# Altium PCB PCB1.PcbDoc (part 3 of 9)
Units mm, origin at the board's own origin, x right, y up, seen from the top; angles counter-clockwise.
Board outline 227 x 102 mm, 4 copper layers (Top Layer, MidLayer1, MidLayer2, Bottom Layer); 425 components, 426 nets, 1455 pads, 440 vias.
Unrouted connection lines stored in the file: 2.
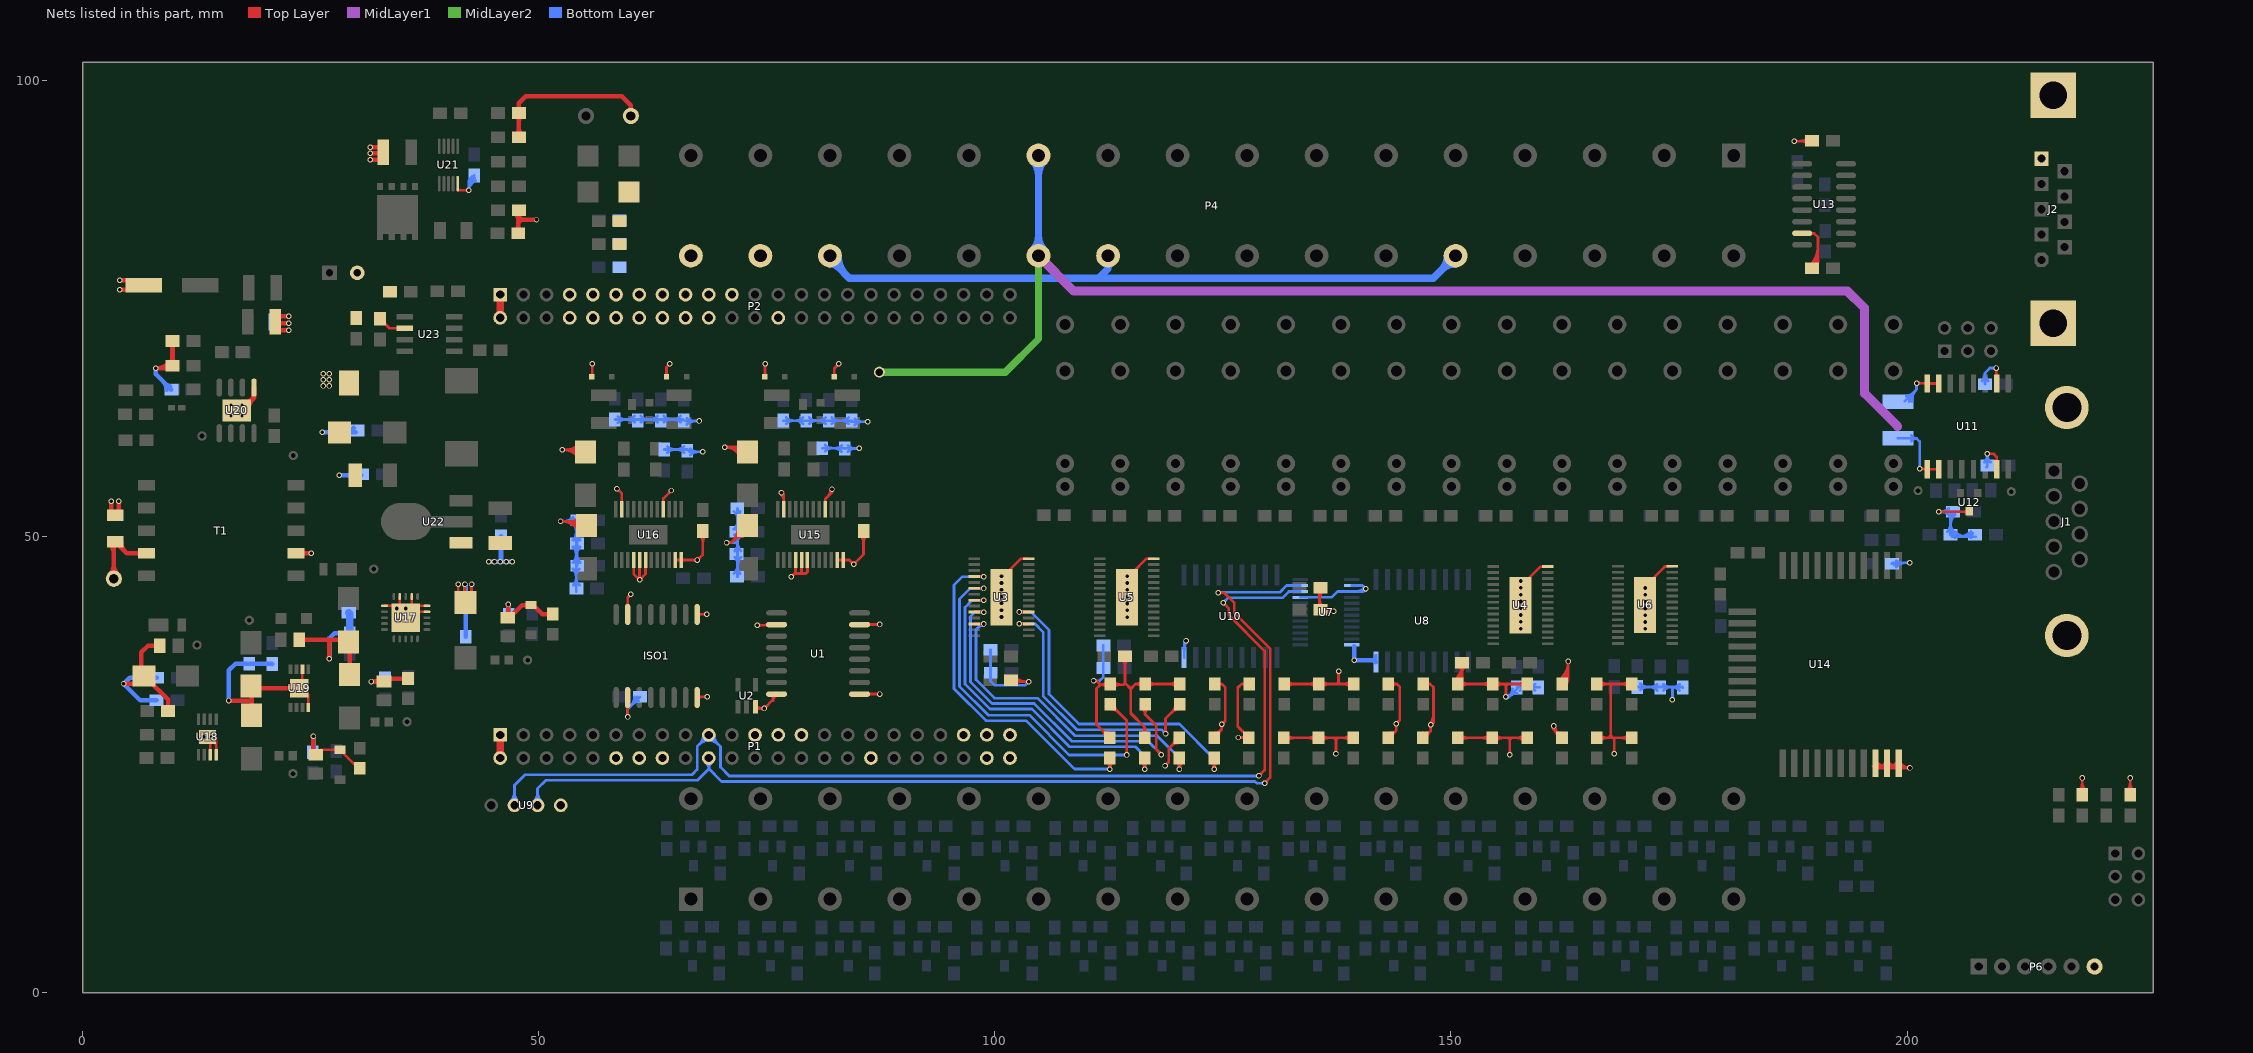
[diagram p5: the nets of this part, all layers, seen from the top]

## Via types
v1: diameter 0.6, hole 0.4, Top Layer to Bottom Layer, 427 vias
v2: diameter 0.5, hole 0.2, Top Layer to Bottom Layer, 9 vias
v3: diameter 0.66, hole 0.33, Top Layer to Bottom Layer, 4 vias

## Nets (pads, with @x,y where several pads share a name; then routed paths per layer and width w, separated by ;. In a path a pad name is that pad's centre, name@x,y a point inside that pad or via, vN(x,y) a via of type N, cw(c..) or ccw(c..) an arc to the next point about the centre after c; other vN are vias at no path point) (continued)
DGND: C1.1 C2.1 C3.1 C4.1 C5.1 C6.1 C7.1 C8.1 C9.1 C10.1 C11.1 C12.1 C13.1 C14.1 C15.1 C16.2 C21.2 C24.1 C25.2 C26.1 C27.1 C28.1 C48.2 C80.2 C81.2 C82.2 C83.2 C85.1 C86.2 C87.2 C88.2 C89.1 C90.1 C92.2 C93.2 C94.1 C95.2 C96.2 CA1.2 CA2.2 D2.1 D3.2 D4.2 D5.2 D6.2 D7.2 D8.2 D9.2 D10.2 D11.2 D12.2 D13.2 D14.2 D15.2 D16.2 D17.2 D18.2 D19.2 D20.2 D21.2 D22.2 D23.2 D24.2 D25.2 D26.2 D27.2 D28.2 D29.2 D30.2 D31.2 D32.2 D33.2 D34.2 D67.2 ISO1.2 ISO1.8 J2.5 J2.10 J2.11 P1.1 P1.2 P1.43 P1.44 P1.45 P1.46 P2.1 P2.2 P4.10 P4.20 P4.28 P4.30 P4.32 P6.6 R3.1 R4.1 R7.1 R8.1 R147.1 R148.1 R153.1 R154.1 R155.1 R157.2 TP12.1 U1.2 U1.8 U1.9 U1.15 U2.3 U3.28 U3.29 U4.28 U4.29 U5.28 U5.29 U6.28 U6.29 U7.2 U7.3 U7.12 U7.21 U8.9 U9.4 U10.9 U11.2 U11.7 U11.8 U13.15 U14.30 U14.31 U14.32 U20.1 U20.9 U21.5 U22.1 U23.6 | length 575.5
  Top Layer w0.3: C90.1@32.61,73.906 33.652,72.864 U23.6@35.33,72.864 ; C90.1@33.095,73.779 ccw(c33.959,73.779) 33.348,73.168 ; U21.5@41.13,88.13 41.27,87.99 v1(42.33,87.99) ; v1@42.224,87.884 ccw(c41.968,87.628) 41.968,87.99 ccw(c41.968,88.352) v1@42.224,88.096 ; ISO1.2@59.649,31.434 cw(c59.357,31.142) 59.77,31.142 ; v1@59.664,30.366 ccw(c59.408,30.622) 59.77,30.622 ccw(c60.132,30.622) v1@59.876,30.366 ; ISO1.2@59.755,32.39 59.77,32.375 v1(59.77,30.26) ; 59.77,31.214 cw(c60.081,31.214) ISO1.2@59.861,31.434 ; ISO1.8@67.375,32.39 67.445,32.46 v1(68.48,32.46) ; ISO1.8@67.481,32.284 cw(c67.906,31.859) 67.906,32.46 ; v1@68.374,32.354 ccw(c68.118,32.098) 68.118,32.46 ccw(c68.118,32.822) v1@68.374,32.566 ; U2.3@73.75,31.376 73.936,31.19 v1(74.73,31.19) 75.69,32.15 75.69,32.69 U1.8@75.81,32.81 ; U2.3@73.841,31.468 ccw(c74.512,32.138) v1@74.512,31.19 ; v1(73.97,40.31) 75.995,40.31 U1.2@76.07,40.385 ; v1@74.076,40.204 cw(c74.332,39.948) 74.332,40.31 cw(c74.332,40.672) v1@74.076,40.416 ; v1@74.624,31.084 ccw(c74.368,30.828) 74.368,31.19 ccw(c74.368,31.552) v1@74.624,31.296 ; 74.677,40.31 ccw(c74.677,40.928) U1.2@75.114,40.491 ; v1@74.73,31.34 ccw(c74.73,31.702) 74.986,31.446 ccw(c75.242,31.19) v1@74.88,31.19 ; 75.69,32.042 cw(c76.298,32.042) U1.8@76.115,32.622 ; 75.69,32.451 cw(c76.169,32.451) U1.8@76.025,32.908 ; U1.9@84.93,32.71 84.99,32.77 v1(87.37,32.77) ; U1.15@85.17,40.385 85.185,40.4 v1(87.37,40.4) ; U1.9@86.126,32.659 cw(c86.394,32.391) 86.394,32.77 ; U1.9@86.126,32.871 ccw(c86.37,33.115) 86.37,32.77 ; U1.15@86.126,40.279 cw(c86.418,39.987) 86.418,40.4 ; U1.15@86.126,40.491 ccw(c86.346,40.711) 86.346,40.4 ; v1@87.264,32.664 ccw(c87.008,32.408) 87.008,32.77 ccw(c87.008,33.132) v1@87.264,32.876 ; v1@87.264,40.294 ccw(c87.008,40.038) 87.008,40.4 ccw(c87.008,40.762) v1@87.264,40.506 ; U3.29@101.238,45.997 102.846,47.605 U3.28@103.702,47.605 ; R3.1@101.78,34.28 101.94,34.12 v1(103.71,34.12) ; R3.1@102.038,34.411 ccw(c102.74,35.113) 102.74,34.12 ; R3.1@102.25,33.937 cw(c102.692,33.495) 102.692,34.12 ; R3.1@102.25,34.623 ccw(c103.464,35.837) v1@103.464,34.12 ; v1@103.604,34.014 ccw(c103.348,33.758) 103.348,34.12 ccw(c103.348,34.482) v1@103.604,34.226 ; v1(110.82,34.225) 111.145,34.225 111.58,33.79 ; 111.662,28.909 ccw(c112.601,29.848) D3.2@112.601,28.52 ; 111.819,28.752 cw(c111.102,28.035) D3.2@112.116,28.035 ; D4.2@112.29,34.119 cw(c111.58,34.721) 111.58,33.79 ; D4.2@112.305,33.474 ccw(c111.58,32.799) 111.58,33.79 ; D4.2@112.58,33.79 D4.2@112.66,33.87 ; D3.2@112.601,27.97 111.15,29.421 111.15,33.36 111.58,33.79 ; D4.2@113.003,33.462 cw(c113.795,32.67) 113.795,33.79 ; D4.2@113.003,34.148 ccw(c113.867,35.012) 113.867,33.79 ; R7.1@113.937,36.577 cw(c113.109,35.749) 114.28,35.749 cw(c115.451,35.749) R7.1@114.623,36.577 ; R7.1@114.28,36.92 114.28,33.967 ; U5.29@114.951,45.931 116.625,47.605 U5.28@117.442,47.605 ; D5.2@116.084,28.391 ccw(c115.383,29.146) 116.414,29.146 ; D6.2@116.099,33.557 ccw(c115.423,32.985) 115.423,33.87 ; D6.2@116.099,34.183 cw(c115.423,34.755) 115.423,33.87 ; D5.2@116.414,27.97 116.414,29.146 ; D5.2@116.744,28.391 cw(c117.444,29.146) 116.414,29.146 ; D6.2@116.812,33.527 cw(c117.64,32.699) 117.64,33.87 cw(c117.64,35.041) D6.2@116.812,34.213 ; v1(118.66,24.9) 119.05,25.29 119.05,26.793 D7.2@120.227,27.97 ; v1@118.66,25.05 ccw(c118.66,25.412) 118.916,25.156 ccw(c119.172,24.9) v1@118.81,24.9 ; 119.288,27.031 cw(c120.227,26.092) D7.2@120.227,27.42 ; 119.445,27.188 ccw(c118.728,27.905) D7.2@119.742,27.905 ; D8.2@119.935,33.527 ccw(c119.107,32.699) 119.107,33.87 ccw(c119.107,35.041) D8.2@119.935,34.213 ; D8.2@120.278,33.87 115.423,33.87 ; D9.2@124.039,28.52 ccw(c124.039,29.584) 124.791,28.831 ; D10.2@124.087,33.87 124.87,33.87 ; D9.2@124.17,28.21 124.87,28.91 ; D10.2@124.522,33.654 cw(c124.87,33.481) 124.87,33.87 ; D10.2@124.522,34.086 ccw(c124.87,34.259) 124.87,33.87 ; D9.2@124.524,28.047 cw(c125.705,28.075) 124.87,28.91 ; v1@124.764,29.334 cw(c124.508,29.078) 124.87,29.078 cw(c125.232,29.078) v1@124.976,29.334 ; v1@124.87,29.59 ccw(c124.87,29.952) 125.126,29.696 ccw(c125.382,29.44) v1@125.02,29.44 ; v1(126.699,28.007) D11.2@127.852,28.007 ; D11.2@127.852,27.97 D11.2@127.852,28.007 ; D12.2@127.897,33.87 127.034,33.87 126.627,33.463 126.627,29.232 D11.2@127.852,28.007 ; D13.2@131.665,27.97 D17.2@139.291,27.97 ; D14.2@131.706,33.87 D18.2@139.324,33.87 ; D13.2@132.008,27.627 cw(c132.836,26.799) 132.836,27.97 cw(c132.836,29.141) D13.2@132.008,28.313 ; D14.2@132.049,33.527 cw(c132.877,32.699) 132.877,33.87 cw(c132.877,35.041) D14.2@132.049,34.213 ; D15.2@135.135,27.627 ccw(c134.307,26.799) 134.307,27.97 ccw(c134.307,29.141) D15.2@135.135,28.313 ; D16.2@135.172,33.527 ccw(c134.344,32.699) 134.344,33.87 ccw(c134.344,35.041) D16.2@135.172,34.213 ; C14.1@135.286,44.067 cw(c134.528,43.309) 135.6,43.309 ; C15.1@135.303,42.253 ccw(c134.586,42.97) 135.6,42.97 ; C15.1@135.6,41.65 C14.1@135.6,44.254 ; 135.6,43.169 cw(c136.87,43.169) C14.1@135.972,44.067 ; 135.6,43.192 ccw(c136.928,43.192) C15.1@135.989,42.253 ; C15.1@135.716,41.84 v1(137.13,41.84) ; D15.2@135.821,27.627 cw(c136.649,26.799) 136.649,27.97 cw(c136.649,29.141) D15.2@135.821,28.313 ; D16.2@135.858,33.527 cw(c136.686,32.699) 136.686,33.87 cw(c136.686,35.041) D16.2@135.858,34.213 ; C15.1@136.116,41.567 cw(c136.775,40.908) 136.775,41.84 ; C15.1@136.116,42.253 ccw(c137.113,43.25) v1@137.113,41.84 ; 137.18,27.97 137.39,27.76 ; v1@137.284,26.326 ccw(c137.028,26.582) 137.39,26.582 ccw(c137.752,26.582) v1@137.496,26.326 ; v1(137.39,26.22) 137.39,27.76 ; 137.44,33.87 137.68,34.11 ; v1@137.574,35.144 cw(c137.318,34.888) 137.68,34.888 cw(c138.042,34.888) v1@137.786,35.144 ; 137.6,27.97 137.39,27.76 ; v1(137.68,35.25) 137.68,34.11 ; 137.92,33.87 137.68,34.11 ; D17.2@138.948,27.627 ccw(c138.12,26.799) 138.12,27.97 ccw(c138.12,29.141) D17.2@138.948,28.313 ; D18.2@138.981,33.527 ccw(c138.153,32.699) 138.153,33.87 ccw(c138.153,35.041) D18.2@138.981,34.213 ; D20.2@143.133,33.87 144.07,33.87 ; D19.2@143.199,28.511 ccw(c143.371,29.369) 143.99,28.75 ; D19.2@143.49,28.25 143.99,28.75 ; D20.2@143.529,33.59 cw(c144.07,33.208) 144.07,33.87 ; D20.2@143.529,34.15 ccw(c144.07,34.532) 144.07,33.87 ; D19.2@143.588,28.035 cw(c144.345,28.035) 143.81,28.57 ; v1@143.884,29.414 cw(c143.628,29.158) 143.99,29.158 cw(c144.352,29.158) v1@144.096,29.414 ; v1@143.99,29.67 ccw(c143.99,30.032) 144.246,29.776 ccw(c144.502,29.52) v1@144.14,29.52 ; D21.2@146.916,27.97 D21.2@146.916,28.526 ; D22.2@146.942,33.87 147.72,33.87 ; D21.2@147.033,28.506 ccw(c147.221,29.259) 147.77,28.71 ; D21.2@147.14,28.08 147.77,28.71 ; D22.2@147.378,33.657 cw(c147.72,33.489) 147.72,33.87 ; D22.2@147.378,34.083 ccw(c147.72,34.251) 147.72,33.87 ; D21.2@147.401,28.035 cw(c148.141,28.035) 147.618,28.558 ; v1@147.664,29.284 cw(c147.408,29.028) 147.77,29.028 cw(c148.132,29.028) 147.876,29.284 ccw(c147.384,29.776) 148.08,29.776 ; v1@147.664,29.496 ccw(c146.659,30.501) 148.08,30.501 ; v1@147.77,29.54 ccw(c147.77,29.902) 148.026,29.646 ccw(c148.282,29.39) v1@147.92,29.39 ; D24.2@150.415,34.284 ccw(c148.571,36.2) R4.1@151.23,36.2 151.23,34.09 D24.2@151.01,33.87 ; D24.2@150.623,34.068 ccw(c149.25,35.495) 151.23,35.495 ; D23.2@150.729,27.97 156.25,27.97 ; D24.2@150.752,33.87 D28.2@158.37,33.87 ; D24.2@150.831,33.852 ccw(c149.929,34.789) 151.23,34.789 ; R4.1@150.887,35.857 cw(c150.059,35.029) 151.23,35.029 cw(c152.401,35.029) R4.1@151.573,35.857 ; D23.2@151.072,27.627 cw(c151.9,26.799) 151.9,27.97 cw(c151.9,29.141) D23.2@151.072,28.313 ; D24.2@151.095,33.527 cw(c151.922,32.699) 151.922,33.87 cw(c151.922,35.041) D24.2@151.095,34.213 ; D25.2@154.199,27.627 ccw(c153.371,26.799) 153.371,27.97 ccw(c153.371,29.141) D25.2@154.199,28.313 ; D26.2@154.218,33.527 ccw(c153.39,32.699) 153.39,33.87 ccw(c153.39,35.041) D26.2@154.218,34.213 ; D25.2@154.885,27.627 cw(c155.713,26.799) 155.713,27.97 cw(c155.713,29.141) D25.2@154.885,28.313 ; D26.2@154.904,33.527 cw(c155.732,32.699) 155.732,33.87 cw(c155.732,35.041) D26.2@154.904,34.213 ; 155.85,33.81 156.02,33.64 ; v1@155.914,32.566 ccw(c155.658,32.822) 156.02,32.822 ccw(c156.382,32.822) v1@156.126,32.566 ; v1(156.02,32.46) 156.02,33.64 ; 156.19,33.81 156.02,33.64 ; 156.25,27.98 156.45,27.78 ; 156.26,27.97 D27.2@158.355,27.97 ; v1@156.344,26.236 ccw(c156.088,26.492) 156.45,26.492 ccw(c156.812,26.492) v1@156.556,26.236 ; v1(156.45,26.13) 156.45,27.78 ; 156.65,27.98 156.45,27.78 ; D27.2@158.012,27.627 ccw(c157.184,26.799) 157.184,27.97 ccw(c157.184,29.141) D27.2@158.012,28.313 ; D28.2@158.027,33.527 ccw(c157.199,32.699) 157.199,33.87 ccw(c157.199,35.041) D28.2@158.027,34.213 ; U4.29@158.049,44.984 159.8,46.735 U4.28@160.592,46.735 ; v1@161.11,29.27 ccw(c161.695,29.27) 161.281,28.856 ; v1(161.26,29.27) 161.26,28.878 D29.2@162.168,27.97 ; 161.293,28.845 ccw(c162.083,29.635) D29.2@162.142,28.519 ; 161.386,28.752 cw(c160.669,28.035) D29.2@161.683,28.035 ; v1@161.41,29.27 ccw(c162.72,29.27) D29.2@161.794,28.344 ; D30.2@161.876,34.314 ccw(c160.255,36.34) v1(162.85,36.34) 162.85,34.37 ; D30.2@162.064,34.079 ccw(c160.755,35.716) 162.85,35.716 ; D30.2@162.251,33.845 ccw(c161.254,35.092) 162.85,35.092 ; D30.2@162.41,33.93 162.85,34.37 ; D30.2@162.438,33.611 ccw(c161.753,34.467) 162.85,34.467 ; D30.2@162.455,34.334 ccw(c162.631,34.589) 162.85,34.37 ; D30.2@162.664,33.935 cw(c163.265,33.935) 162.84,34.36 ; v1@162.744,36.234 cw(c162.488,35.978) 162.85,35.978 cw(c163.212,35.978) v1@162.956,36.234 ; D32.2@165.8,33.75 165.92,33.87 D34.2@169.797,33.87 ; D31.2@165.98,27.97 D33.2@169.793,27.97 ; D31.2@166.323,27.627 cw(c167.151,26.799) 167.151,27.97 cw(c167.151,29.141) D31.2@166.323,28.313 ; D32.2@166.331,33.527 cw(c167.159,32.699) 167.159,33.87 cw(c167.159,35.041) D32.2@166.331,34.213 ; 167.25,27.97 167.51,28.23 ; 167.51,33.87 167.51,28.23 ; 167.74,27.97 167.89,27.82 ; 167.77,27.97 167.51,28.23 ; v1@167.784,26.336 ccw(c167.528,26.592) 167.89,26.592 ccw(c168.252,26.592) v1@167.996,26.336 ; v1(167.89,26.23) 167.89,27.82 ; 168.04,27.97 167.89,27.82 ; D33.2@169.45,27.627 ccw(c168.622,26.799) 168.622,27.97 ccw(c168.622,29.141) D33.2@169.45,28.313 ; D34.2@169.454,33.527 ccw(c168.626,32.699) 168.626,33.87 ccw(c168.626,35.041) D34.2@169.454,34.213 ; U6.29@171.545,44.852 173.41,46.717 173.432,46.717 173.48,46.765 U6.28@174.252,46.765 ; v1(187.61,93.37) 189.564,93.37 C24.1@189.594,93.4 ; v1@187.716,93.264 cw(c187.972,93.008) 187.972,93.37 cw(c187.972,93.732) v1@187.716,93.476 ; 188.224,93.37 ccw(c188.224,94.643) C24.1@189.124,93.743 ; 188.369,93.37 cw(c188.369,92.302) C24.1@189.124,93.057 ; U13.15@188.5,83.273 189.807,83.273 190.23,82.85 190.23,80.076 ; C25.2@189.378,79.783 ccw(c187.321,81.84) 190.23,81.84 ; U13.15@189.406,83.167 cw(c189.662,82.911) 189.662,83.273 cw(c189.662,83.635) U13.15@189.406,83.379 ; C25.2@189.59,79.571 ccw(c188.046,81.115) 190.23,81.115 ; C25.2@189.594,79.44 190.23,80.076 ; C25.2@189.78,79.921 ccw(c189.847,80.459) 190.23,80.076 ; C25.2@189.802,79.359 ccw(c188.77,80.391) 190.23,80.391 ; C25.2@190.158,79.651 cw(c190.493,79.813) 190.23,80.076 ; U14.30@196.247,24.88 ccw(c196.755,25.388) U14.30@196.755,24.67 ; U14.30@196.459,25.092 ccw(c197.479,26.112) U14.31@197.479,24.67 ; U14.30@196.58,24.63 U14.30@196.62,24.67 ; U14.30@196.671,25.304 ccw(c198.203,26.836) 198.203,24.67 ; 197.131,24.67 ccw(c197.131,25.536) U14.31@197.887,25.114 ; 197.397,24.67 ccw(c197.397,26.836) U14.32@198.929,25.304 ; U14.31@197.517,24.88 ccw(c198.025,25.388) U14.31@198.025,24.67 ; U14.31@197.625,25.26 cw(c196.62,25.821) U14.30@196.62,24.67 ; U14.31@197.642,24.67 ccw(c197.642,25.251) U14.31@198.149,24.968 ; U14.31@197.729,25.092 ccw(c198.749,26.112) U14.32@198.749,24.67 ; U14.31@197.941,25.304 ccw(c199.473,26.836) 199.473,24.67 ; U14.31@198.121,24.67 ccw(c198.121,26.112) U14.32@199.141,25.092 ; U14.32@198.729,24.953 ccw(c199.236,25.265) U14.32@199.236,24.67 ; U14.32@198.845,24.67 ccw(c198.845,25.388) U14.32@199.353,24.88 ; U14.32@198.985,25.111 ccw(c199.773,25.596) 199.773,24.67 ; U14.32@199.24,25.268 ccw(c200.31,25.926) v1(200.31,24.67) U14.30@196.62,24.67 ; v1@200.204,24.564 ccw(c199.948,24.308) 199.948,24.67 ccw(c199.948,25.032) v1@200.204,24.776 ; v1(201.04,66.85) 202.155,66.85 U11.8@202.195,66.81 U11.7@203.465,66.81 ; v1@201.146,66.744 cw(c201.402,66.488) 201.402,66.85 cw(c201.402,67.212) v1@201.146,66.956 ; 201.736,66.85 cw(c201.736,66.351) U11.8@202.089,66.704 ; U11.8@202.301,66.704 cw(c202.557,66.448) 202.557,66.81 cw(c202.557,67.172) U11.8@202.301,66.916 ; U11.7@203.359,66.704 ccw(c203.103,66.448) 203.103,66.81 ccw(c203.103,67.172) U11.7@203.359,66.916 ; v1@209.654,68.394 cw(c209.398,68.138) 209.76,68.138 cw(c210.122,68.138) v1@209.866,68.394 ; 209.76,68.005 ccw(c210.31,68.005) U11.2@209.921,67.616 ; v1(209.76,68.5) 209.76,66.865 U11.2@209.815,66.81 ; C28.1@218.874,22.2 ccw(c218.11,22.964) 219.19,22.964 ; v1@219.084,23.464 cw(c218.828,23.208) 219.19,23.208 cw(c219.552,23.208) v1@219.296,23.464 ; 219.19,23.092 ccw(c220.452,23.092) C28.1@219.56,22.2 ; v1(219.19,23.57) 219.19,21.757 C28.1@219.217,21.73 ; C27.1@224.107,22.2 ccw(c223.279,23.028) 224.45,23.028 ccw(c225.621,23.028) C27.1@224.793,22.2 ; v1@224.344,23.464 cw(c224.088,23.208) 224.45,23.208 cw(c224.812,23.208) v1@224.556,23.464 ; C27.1@224.45,21.73 v1(224.45,23.57) ; 111.58,33.79 114.103,33.79 114.28,33.967 ; 114.28,33.967 114.9,33.347 ; 114.9,33.347 114.9,30.66 116.414,29.146 ; 114.9,33.347 115.423,33.87 ; 124.87,28.91 v1(124.87,29.44) 125.266,29.836 125.266,33.474 124.87,33.87 ; 143.99,28.75 v1(143.99,29.52) 144.39,29.92 144.39,33.55 144.07,33.87 ; 147.72,33.87 148.08,33.51 148.08,29.7 v1(147.77,29.39) 147.77,28.71 ; 161.26,28.908 ccw(c160.898,28.908) 161.154,29.164 cw(c160.898,28.908) 161.26,28.908 ; 161.26,28.908 cw(c161.622,28.908) 161.366,29.164 ccw(c161.622,28.908) 161.26,28.908
  Top Layer w0.5: v1(3.14,53.92) 3.14,52.552 C85.1@3.219,52.473 ; v1(3.98,53.92) 3.98,52.374 C85.1@3.986,52.368 ; v1(4.083,77.067) 5.849,77.067 C81.2@5.972,77.19 ; v1(4.083,78.128) 5.474,78.128 C81.2@5.723,77.879 ; v1(8.02,68.49) 9.89,68.49 R147.1@9.97,68.57 ; v1@8.128,68.49 ccw(c8.128,70.375) R147.1@9.461,69.042 ; R147.1@9.588,69.042 ccw(c8.931,69.699) 9.86,69.699 ccw(c10.789,69.699) R147.1@10.132,69.042 ; R148.1@9.588,71.198 cw(c8.931,70.541) 9.86,70.541 cw(c10.789,70.541) R148.1@10.132,71.198 ; R147.1@9.86,68.77 R148.1@9.86,71.47 ; U20.9@17.397,64.801 ccw(c17.668,66.372) 18.795,65.245 ; U20.9@18.19,63.86 cw(c20.073,63.86) 18.742,65.192 ; U20.9@18.24,64.69 18.795,65.245 ; 18.448,64.898 ccw(c17.727,65.618) U20.1@18.745,65.658 ; U20.1@18.795,66.36 18.795,65.245 ; C82.2@20.951,73.967 21.154,74.17 v1(22.6,74.17) ; C82.2@20.972,73.272 21.1,73.4 v1(22.6,73.4) ; C82.2@21.211,72.587 21.254,72.63 v1(22.6,72.63) ; v1(31.52,91.34) 33.183,91.34 C86.2@33.239,91.284 ; v1(31.52,92.03) 33.094,92.03 C86.2@33.364,92.3 ; v1(31.52,92.72) 32.788,92.72 C86.2@32.793,92.715 ; R154.1@47.425,85.538 cw(c46.615,84.728) 47.76,84.728 ; C87.2@47.488,83.552 ccw(c46.831,84.209) 47.76,84.209 ccw(c48.689,84.209) C87.2@48.032,83.552 ; R153.1@47.562,94.092 ccw(c46.905,94.749) 47.834,94.749 ccw(c48.763,94.749) R153.1@48.106,94.092 ; R155.1@47.562,96.188 cw(c46.905,95.531) 47.834,95.531 cw(c48.763,95.531) R155.1@48.106,96.188 ; C87.2@47.76,83.28 47.76,85.746 R154.1@47.824,85.81 ; 47.76,84.4 48.14,84.78 ; 47.76,85.033 cw(c48.474,85.033) R154.1@47.969,85.538 ; 47.76,85.16 48.14,84.78 ; R153.1@47.834,93.82 47.834,97.545 48.591,98.302 59.106,98.302 60.1,97.308 TP12.1@60.1,96.14 ; v1(49.76,84.78) 48.14,84.78
  Top Layer w0.8: P1.2@45.533,25.997 ccw(c44.935,26.595) 45.78,26.595 ccw(c46.625,26.595) P1.2@46.027,25.997 ; P1.1@45.533,28.043 cw(c44.935,27.445) 45.78,27.445 cw(c46.625,27.445) P1.1@46.027,28.043 ; P2.2@45.533,74.257 ccw(c44.935,74.855) 45.78,74.855 ccw(c46.625,74.855) P2.2@46.027,74.257 ; P2.1@45.533,76.303 cw(c44.935,75.705) 45.78,75.705 cw(c46.625,75.705) P2.1@46.027,76.303 ; P1.2@45.78,25.75 P1.1@45.78,28.29 ; P2.2@45.78,74.01 P2.1@45.78,76.55
  Bottom Layer w0.3: v1@42.224,88.096 ccw(c41.968,88.352) 42.33,88.352 ccw(c42.692,88.352) v1@42.436,88.096 ; v1@42.33,87.877 cw(c43.586,87.877) C88.2@43.108,89.038 ; v1(42.33,87.99) 42.33,89.02 C88.2@42.924,89.614 ; 42.33,88.324 cw(c43.402,88.324) C88.2@42.994,89.316 ; 42.33,88.772 cw(c43.218,88.772) C88.2@42.88,89.593 ; v1@59.664,30.366 ccw(c59.408,30.622) 59.77,30.622 ccw(c60.132,30.622) v1@59.876,30.366 ; v1(59.77,30.26) 59.77,31.114 C48.2@61.106,32.45 ; 60.061,31.405 ccw(c59.017,32.45) C48.2@60.494,32.45 ; 60.368,31.712 cw(c60.979,31.101) C48.2@60.979,31.965 ; C48.2@60.573,31.917 ccw(c60.041,32.45) C48.2@60.794,32.45 ; C7.1@99.52,37.63 99.52,34.205 100.001,33.724 103.314,33.724 v1(103.71,34.12) ; v1(110.82,34.225) 111.47,34.225 111.894,34.649 C11.1@111.894,38.09 ; U10.9@120.658,37.737 ccw(c120.438,37.957) 120.75,37.957 ccw(c121.062,37.957) U10.9@120.841,37.737 ; U10.9@120.75,36.769 120.75,38.39 v1(120.96,38.6) ; U10.9@120.75,37.731 cw(c121.829,37.731) v1@121.066,38.494 ; U7.21@133.491,43.365 136.905,43.365 137.555,44.015 140.345,44.015 v1(140.64,44.31) 140.285,44.665 U7.2@139.129,44.665 ; U7.3@139.566,44.015 ccw(c139.566,45.384) v1@140.534,44.416 ; 140.29,44.015 ccw(c140.29,44.66) v1@140.746,44.204 ; v1@140.49,44.31 ccw(c140.128,44.31) 140.384,44.566 ccw(c140.64,44.822) v1@140.64,44.46 ; U8.9@141.68,36.9 U8.9@141.78,36.8 ; U8.9@141.78,36.299 U8.9@141.78,37.01 ; v1@156.02,32.31 ccw(c156.02,32.769) 156.344,32.444 ; v1(156.02,32.46) 156.36,32.46 ; v1@156.02,32.61 ccw(c156.02,33.793) C8.1@156.856,32.956 ; v1@156.131,32.359 cw(c156.36,32.15) 156.36,32.46 ; v1@156.131,32.561 ccw(c156.36,32.77) 156.36,32.46 ; 156.39,32.49 ccw(c155.54,33.34) C8.1@156.742,33.34 ; 156.421,32.521 cw(c157.227,31.715) C8.1@157.227,32.855 ; C8.1@157.227,33.467 157.26,33.5 C9.1@159.7,33.5 ; C8.1@157.4,33.5 156.36,32.46 ; C8.1@157.57,33.124 cw(c158.478,32.216) 158.478,33.5 ; C8.1@157.57,33.81 ccw(c158.318,34.557) 158.318,33.5 ; 158.355,33.5 cw(c158.355,32.295) C9.1@159.207,33.147 ; 158.403,33.5 ccw(c158.403,34.637) C9.1@159.207,33.833 ; R8.1@170.431,33.551 175.336,33.551 C12.1@175.397,33.49 ; R8.1@170.774,33.208 cw(c171.602,32.38) 171.602,33.551 cw(c171.602,34.722) R8.1@170.774,33.894 ; 171.629,33.551 cw(c171.629,32.172) C13.1@172.604,33.147 ; 171.923,33.551 ccw(c171.923,34.514) C13.1@172.604,33.833 ; C13.1@173.29,33.147 cw(c174.265,32.172) 174.265,33.551 ; C13.1@173.29,33.833 ccw(c173.971,34.514) 173.971,33.551 ; 174.079,33.551 cw(c174.079,32.172) C12.1@175.054,33.147 ; 174.12,33.551 174.27,33.401 ; v1@174.164,32.266 ccw(c173.908,32.522) 174.27,32.522 ccw(c174.632,32.522) v1@174.376,32.266 ; v1(174.27,32.16) 174.27,33.401 ; 174.373,33.551 ccw(c174.373,34.514) C12.1@175.054,33.833 ; 174.42,33.551 174.27,33.401 ; C26.1@198.34,47.05 198.46,47.17 v1(200.28,47.17) ; C26.1@198.598,46.919 cw(c199.203,46.314) 199.203,47.17 ; C26.1@198.81,46.707 cw(c199.928,45.589) 199.928,47.17 ; C26.1@198.81,47.393 ccw(c199.348,47.931) 199.348,47.17 ; C21.2@199.73,64.85 201.04,66.16 ; C21.2@199.89,65.45 ccw(c199.89,66.512) 200.641,65.761 ; v1@200.174,47.064 ccw(c199.918,46.808) 199.918,47.17 ccw(c199.918,47.532) v1@200.174,47.276 ; C21.2@200.239,64.821 cw(c201.368,64.889) 200.568,65.688 ; C21.2@200.539,64.839 cw(c202.257,64.943) 201.04,66.16 ; v1@200.934,66.744 cw(c200.678,66.488) 201.04,66.488 cw(c201.402,66.488) v1@201.146,66.744 ; v1(201.04,66.85) 201.04,66.16 ; C16.2@208.211,67.083 ccw(c207.441,67.853) 208.53,67.853 ; C16.2@208.554,66.74 208.53,66.764 208.53,67.96 ; C16.2@208.895,67.085 cw(c209.761,67.96) 208.53,67.96 ; v1@209.654,68.394 ccw(c209.398,68.138) 209.398,68.5 ccw(c209.398,68.862) v1@209.654,68.606 ; v1(209.76,68.5) 209.07,68.5 208.53,67.96
  Bottom Layer w0.5: v1(8.02,68.49) 8.02,67.844 C80.2@9.734,66.13 ; 8.86,67.004 cw(c7.986,66.13) C80.2@9.222,66.13 ; C80.2@9.167,66.697 ccw(c9.607,67.138) C80.2@9.607,66.515 ; v1(26.27,61.47) C94.1@29.94,61.47 ; v1(28.15,56.75) C96.2@30.554,56.75 ; 28.615,61.47 ccw(c28.615,63.048) C94.1@29.731,61.932 ; 29.37,56.75 ccw(c29.37,57.987) C96.2@30.245,57.112 ; 29.805,56.75 cw(c29.805,56.128) C96.2@30.245,56.568 ; v1(44.51,47.28) v1(47.09,47.28) ; C95.2@45.598,49.645 cw(c44.941,48.988) 45.87,48.988 cw(c46.799,48.988) C95.2@46.142,49.645 ; v1@45.87,47.35 C95.2@45.87,50.044 ; U7.12@139.39,37.987 v1(139.39,36.46) 141.619,36.46 U8.9@141.78,36.299 ; 141.32,36.46 cw(c141.32,35.839) U8.9@141.759,36.278
  Bottom Layer w0.8: P4.28@81.927,79.91 cw(c81.927,78.575) 82.871,79.519 ; 82.76,79.63 84.04,78.35 148.047,78.35 P4.10@150.507,80.81 ; P4.28@82.827,80.81 ccw(c85.838,80.81) 83.709,78.681 ; 111.36,78.35 112.407,79.397 ; P4.20@112.027,79.994 cw(c111.748,79.397) 112.407,79.397 ; P4.20@112.407,80.81 112.407,79.397 ; P4.20@112.787,79.994 ccw(c113.066,79.397) 112.407,79.397 ; P4.10@149.607,80.81 cw(c147.434,80.81) 148.971,79.274 cw(c150.507,77.737) P4.10@150.507,79.91
  other v1: 171.279,39.912 157.651,39.934 171.279,40.659 157.651,40.681 100.732,41.212 114.53,41.204 157.651,41.427 171.279,41.405 100.732,41.958 114.53,41.95 171.279,42.152 157.651,42.174 114.53,42.697 100.732,42.705 171.279,42.898 157.651,42.92 100.732,43.451 114.53,43.443 171.279,43.645 157.651,43.667 114.53,44.19 100.732,44.198 171.279,44.391 157.651,44.413 100.732,44.944 114.53,44.936 157.651,45.16 100.732,45.691 114.53,45.683 45.155,47.28 45.8,47.28 46.445,47.28 26.38,66.54 27.04,66.54 26.38,67.215 27.04,67.215 26.38,67.89 27.04,67.89
  other v3: 16.29,63.26 17.49,63.26 16.29,64.46 17.49,64.46
GND: 
GND_SIG: C17.2 C18.1 C19.2 C20.2 C21.1 C29.2 C30.1 C31.2 C32.1 C33.2 C34.2 C35.2 C36.2 C38.2 C39.2 C40.2 C41.2 C42.2 C43.1 C44.2 C45.1 C46.2 C47.2 C49.2 C50.2 C52.2 C53.2 C54.2 C55.2 C56.2 C57.1 C58.2 C59.2 C60.2 C61.1 C63.1 C64.1 C65.1 C66.1 C67.1 C68.2 C69.2 C70.2 C71.2 C72.1 C73.2 C74.1 C76.2 C79.2 C84.1 C85.2 D53.2 D54.2 D56.2 D57.2 D58.2 D59.1 D60.1 D61.2 D62.1 ISO1.9 ISO1.15 J1.10 J1.11 P4.21 P4.22 pad.0 R132.1 R136.1 R141.2 T1.4 T1.7 TP13.1 U11.9 U11.10 U11.15 U12.3 U15.4 U15.5 U15.6 U15.11 U15.12 U15.16 U15.23 U16.4 U16.5 U16.6 U16.11 U16.12 U16.16 U16.23 U17.4 U17.5 U17.7 U17.9 U17.11 U17.21 U18.3 U18.4 U18.9 U19.4 U19.6 U19.9 | length 553.7
  Top Layer w0.3: U18.9@13.198,28.212 cw(c13.371,27.896) U18.9@13.625,28.15 ; U18.9@13.266,28.23 cw(c13.283,27.598) U18.9@13.73,28.045 ; U18.9@13.342,27.948 cw(c13.571,27.53) U18.9@13.908,27.867 ; U18.9@13.695,28.08 14.01,27.765 U18.3@14.01,26.124 ; U18.9@13.881,28.069 cw(c13.374,26.887) 14.661,26.887 ; U18.9@13.999,28.345 cw(c13.569,27.342) 14.661,27.342 ; 14.01,27.284 cw(c14.986,27.284) U18.9@14.296,27.974 ; U18.9@14.01,27.717 cw(c14.225,27.717) U18.9@14.204,27.931 ; U18.9@14.07,27.828 cw(c14.332,27.472) U18.9@14.645,27.785 ; U18.9@14.118,28.62 cw(c13.764,27.797) 14.661,27.797 ; U18.9@14.35,28.08 14.661,27.769 U18.4@14.661,26.124 ; U19.9@24.09,33.68 24.092,33.682 U19.6@24.092,35.486 ; U19.9@24.4,33.02 24.74,32.68 U19.4@24.74,31.295 ; C63.1@25.565,26.096 26.127,26.658 D60.1@28.21,26.658 30.244,24.623 D61.2@30.383,24.623 ; U17.11@33.1,42.44 U17.21@33.905,42.44 ; U17.21@34.775,42.627 U17.9@34.775,43.465 ; U17.21@36.075,42.627 U17.7@36.075,43.465 ; U17.21@36.912,41.79 U17.4@37.75,41.79 ; U17.21@36.945,42.44 U17.5@37.75,42.44 ; v1(41.194,44.794) 41.194,42.83 C59.2@41.196,42.828 ; v1(41.917,44.794) 41.917,42.873 C59.2@41.985,42.805 ; v1(42.64,44.794) 42.64,43.044 C59.2@42.777,42.907 ; v1@52.496,51.604 cw(c52.752,51.348) 52.752,51.71 cw(c52.752,52.072) v1@52.496,51.816 ; v1@52.676,59.444 cw(c52.932,59.188) 52.932,59.55 cw(c52.932,59.912) v1@52.676,59.656 ; 52.985,59.55 ccw(c52.985,61.555) C42.2@54.403,60.137 ; 53.029,51.71 cw(c53.029,49.563) C43.1@54.681,50.934 ; 53.25,59.55 cw(c53.25,57.732) C42.2@54.593,58.958 ; 53.6,51.71 ccw(c53.6,53.001) C43.1@54.513,52.088 ; 53.668,51.71 cw(c53.668,50.093) C43.1@54.912,51.126 ; 53.71,59.55 ccw(c53.71,60.83) C42.2@54.615,59.925 ; 53.931,59.55 cw(c53.931,58.353) C42.2@54.815,59.16 ; C42.2@54.372,58.756 ccw(c52.57,57.11) v1(52.57,59.55) 54.865,59.55 C42.2@55.11,59.305 ; C43.1@54.45,50.742 ccw(c52.39,49.033) v1(52.39,51.71) 54.766,51.71 C43.1@55.22,51.256 ; D56.2@55.714,67.636 ccw(c55.313,68.037) 55.88,68.037 ; v1@55.774,68.874 cw(c55.518,68.618) 55.88,68.618 cw(c56.242,68.618) v1@55.986,68.874 ; D56.2@55.82,67.53 55.88,67.59 v1(55.88,68.98) ; v1@58.58,55.13 cw(c58.58,54.768) 58.836,55.024 cw(c59.092,55.28) v1@58.73,55.28 ; v1(58.58,55.28) 59.114,54.746 U16.23@59.114,53.026 ; ISO1.15@59.649,42.446 ccw(c59.405,42.69) 59.75,42.69 ; 59.75,42.714 ccw(c60.129,42.714) ISO1.15@59.861,42.446 ; ISO1.15@59.755,41.49 59.75,41.495 59.75,43.36 v1(60.09,43.7) ; v1@59.94,43.7 cw(c59.578,43.7) 59.834,43.444 cw(c60.09,43.188) v1@60.09,43.55 ; U16.4@60.412,47.464 60.412,45.928 v1(61.06,45.28) 61.713,45.933 U16.6@61.713,47.464 ; v1@60.91,45.28 ccw(c60.548,45.28) 60.804,45.536 ccw(c61.06,45.792) 61.06,45.43 ccw(c61.06,45.792) 61.316,45.536 ; v1@60.954,45.386 ccw(c60.692,45.648) 61.062,45.648 ; v1@61.062,45.282 U16.5@61.062,47.464 ; 61.062,45.637 ccw(c61.417,45.637) v1@61.166,45.386 ; v1@61.21,45.28 cw(c61.572,45.28) 61.316,45.536 ; U16.16@63.666,53.026 63.666,54.206 v1(64.54,55.08) ; D57.2@63.904,67.636 ccw(c63.648,67.892) 64.01,67.892 ccw(c64.372,67.892) D57.2@64.116,67.636 ; D57.2@64.01,67.53 64.01,68.62 v1(64.37,68.98) ; v1@64.22,68.98 cw(c63.858,68.98) 64.114,68.724 cw(c64.37,68.468) v1@64.37,68.83 ; v1@64.39,55.08 cw(c64.028,55.08) 64.284,54.824 cw(c64.54,54.568) v1@64.54,54.93 ; U16.11@64.964,47.464 v1@67.386,47.464 ; 67.019,47.464 cw(c67.019,47.089) v1@67.284,47.354 ; 67.037,47.464 ccw(c67.037,47.813) v1@67.284,47.566 ; ISO1.9@67.375,41.49 67.395,41.51 v1@68.42,41.51 ; v1(67.39,47.46) v1@67.386,47.464 ; v1@67.39,47.61 ccw(c67.39,47.954) 67.633,47.711 ; ISO1.9@67.481,41.384 cw(c67.785,41.08) 67.785,41.51 ; ISO1.9@67.481,41.596 ccw(c67.689,41.804) 67.689,41.51 ; v1@67.54,47.46 cw(c67.92,47.46) 67.651,47.729 ; R136.1@67.647,50.18 cw(c66.819,49.352) 67.99,49.352 cw(c69.161,49.352) R136.1@68.333,50.18 ; R136.1@67.99,50.65 67.99,48.068 v1@67.386,47.464 ; 68.034,41.51 ccw(c68.034,41.906) v1@68.314,41.626 ; 68.082,41.51 cw(c68.082,41.182) v1@68.314,41.414 ; v1@70.496,59.734 cw(c70.752,59.478) 70.752,59.84 cw(c70.752,60.202) v1@70.496,59.946 ; v1(70.59,49.36) 71.11,49.36 C30.1@72.52,50.77 ; v1@70.696,49.254 cw(c70.952,48.998) 70.952,49.36 cw(c70.952,49.722) v1@70.696,49.466 ; 70.918,59.84 cw(c70.918,58.268) C29.2@72.268,59.072 ; 71.172,49.422 ccw(c69.463,51.131) C30.1@71.88,51.131 ; 71.175,49.425 cw(c72.88,47.72) C30.1@72.88,50.131 ; 71.445,59.84 cw(c71.445,58.582) C29.2@72.526,59.225 ; 71.446,59.84 ccw(c71.446,60.854) C29.2@72.163,60.137 ; 71.684,49.934 ccw(c70.487,51.131) C30.1@72.18,51.131 ; 71.687,49.937 cw(c72.88,48.744) C30.1@72.88,50.431 ; C29.2@72.011,58.919 ccw(c70.39,57.954) v1(70.39,59.84) 72.45,59.84 C29.2@72.62,59.67 ; C30.1@72.64,51.63 C30.1@72.77,51.5 ; D53.2@74.664,67.636 ccw(c74.287,68.013) 74.82,68.013 ; v1@74.714,68.874 cw(c74.458,68.618) 74.82,68.618 cw(c75.182,68.618) v1@74.926,68.874 ; D53.2@74.77,67.53 74.82,67.58 v1(74.82,68.98) ; v1@76.504,54.744 cw(c75.634,53.874) U15.23@76.864,53.874 ; v1(76.61,54.85) 76.864,54.596 U15.23@76.864,53.026 ; v1@76.716,54.956 cw(c76.359,54.599) 76.864,54.599 ; 77.922,45.842 ccw(c78.144,45.62) 77.83,45.62 cw(c78.192,45.62) 77.936,45.876 cw(c77.68,46.132) 77.68,45.77 ccw(c77.68,46.18) 77.97,45.89 ; U15.4@78.162,47.464 78.162,46.102 v1(77.68,45.62) 77.69,45.61 78.06,45.98 79.27,45.98 79.463,46.173 U15.6@79.463,47.464 ; 78.812,45.982 U15.5@78.812,47.464 ; U15.16@81.416,53.026 81.416,54.146 82.15,54.88 ; 81.668,54.398 ccw(c80.865,55.2) v1@82,55.2 ; v1@82.054,55.085 cw(c81.884,54.88) 82.15,54.88 ; v1(82.15,55.2) 82.15,54.88 ; v1@82.246,55.085 ccw(c82.416,54.88) 82.15,54.88 ; D54.2@82.304,67.636 ccw(c82.048,67.892) 82.41,67.892 ccw(c82.772,67.892) D54.2@82.516,67.636 ; D54.2@82.41,67.53 82.41,68.48 v1(82.91,68.98) ; U15.11@82.714,47.464 84.046,47.464 v1(84.52,46.99) 85.61,48.08 R132.1@85.61,50.65 ; v1@82.76,68.98 cw(c82.398,68.98) 82.654,68.724 cw(c82.91,68.468) v1@82.91,68.83 ; v1@84.37,46.99 ccw(c84.008,46.99) 84.264,47.246 ccw(c84.52,47.502) 84.52,47.14 ccw(c84.52,47.502) 84.776,47.246 ccw(c85.032,46.99) v1@84.67,46.99 ; R132.1@85.267,50.18 cw(c84.439,49.352) 85.61,49.352 cw(c86.781,49.352) R132.1@85.953,50.18 ; v1(201.37,57.46) 202.145,57.46 U11.9@202.195,57.41 U11.10@203.465,57.41 ; v1@201.476,57.354 cw(c201.732,57.098) 201.732,57.46 cw(c201.732,57.822) v1@201.476,57.566 ; 201.712,57.46 cw(c201.712,56.927) U11.9@202.089,57.304 ; U11.9@202.301,57.304 cw(c202.557,57.048) 202.557,57.41 cw(c202.557,57.772) U11.9@202.301,57.516 ; U11.10@203.359,57.304 ccw(c203.103,57.048) 203.103,57.41 ccw(c203.103,57.772) U11.10@203.359,57.516 ; v1(203.47,52.74) 206.73,52.74 U12.3@206.8,52.81 ; v1@203.576,52.634 cw(c203.832,52.378) 203.832,52.74 cw(c203.832,53.102) v1@203.576,52.846 ; 206.148,52.74 ccw(c206.148,53.412) U12.3@206.623,52.937 ; 206.245,52.74 cw(c206.245,52.205) U12.3@206.623,52.583 ; v1(208.78,59.11) 209.47,59.11 209.81,58.77 209.81,57.415 U11.15@209.815,57.41 ; v1@208.886,59.004 cw(c209.142,58.748) 209.142,59.11 cw(c209.142,59.472) v1@208.886,59.216 ; U11.15@209.709,58.216 ccw(c209.465,58.46) 209.81,58.46 ; 209.81,58.484 ccw(c210.189,58.484) U11.15@209.921,58.216
  Top Layer w0.5: TP13.1@2.978,45.862 ccw(c1.887,46.953) 3.43,46.953 ccw(c4.973,46.953) TP13.1@3.882,45.862 ; C85.2@3.022,49.187 cw(c2.038,48.203) 3.43,48.203 ; TP13.1@3.43,45.41 3.43,49.32 C85.2@3.58,49.47 4.85,48.2 T1.7@7.03,48.2 ; 3.43,48.806 cw(c3.969,48.806) C85.2@3.588,49.187 ; C85.2@4.255,49.464 ccw(c5.817,49.442) 4.712,48.338 ; v1(4.495,33.9) 6.169,33.9 C65.1@6.369,34.1 ; T1.7@6.438,47.963 ccw(c5.866,47.391) 5.866,48.2 ccw(c5.866,49.009) T1.7@6.438,48.437 ; C65.1@6.745,34.745 6.435,35.055 6.435,37.342 7.173,38.08 C84.1@8.444,38.08 ; C65.1@7.048,34.473 9.376,32.145 R141.2@9.376,30.91 ; v1(16.042,32.058) 18.526,32.058 18.541,32.073 ; C69.2@18.465,33.645 C69.2@18.541,33.569 ; C67.1@18.541,30.03 18.541,33.36 18.566,33.385 U19.9@23.769,33.385 ; T1.4@23.39,48.2 23.4,48.21 v1(25.07,48.21) ; C79.2@23.766,38.71 28.642,38.71 C58.2@29.09,38.262 ; T1.4@23.982,47.963 cw(c24.578,47.367) 24.578,48.21 ; T1.4@23.982,48.437 ccw(c24.53,48.985) 24.53,48.21 ; v1(25.311,28.141) 25.311,26.35 C63.1@25.565,26.096 ; v1(27.049,36.629) 27.049,38.71 ; C58.2@29.037,38.715 29.27,38.482 C70.2@29.27,34.901 C70.2@30.029,34.142 ; v1(31.631,34.142) 32.704,34.142 C71.2@32.873,33.973 ; C71.2@33.363,34.463 D62.1@35.673,34.463 ; v1(46.663,42.591) 46.663,41.005 48.181,42.523 D58.2@49.16,42.523 ; D58.2@49.423,42.523 50.413,41.533 D59.1@51.553,41.533
  MidLayer1 w1: P4.22@104.787,80.81 108.663,76.934 193.467,76.934 195.335,75.066 195.335,65.732 198.957,62.11
  MidLayer2 w0.8: pad.0@87.344,68.053 101.155,68.053 104.787,71.685 P4.22@104.787,80.81
  Bottom Layer w0.3: v1(52.39,51.71) 54.134,51.71 C44.2@54.224,51.8 C50.2@54.224,46.84 ; v1@52.496,51.604 cw(c52.752,51.348) 52.752,51.71 cw(c52.752,52.072) v1@52.496,51.816 ; 52.709,51.71 ccw(c52.709,53.188) C44.2@53.754,52.143 ; 53.143,51.71 cw(c53.143,50.846) 53.754,51.457 cw(c52.885,50.588) 54.114,50.588 ; 53.433,51.71 ccw(c53.433,52.464) C44.2@53.966,51.931 ; C45.1@53.741,48.927 cw(c52.839,48.025) 54.114,48.025 ; C45.1@53.741,49.613 ccw(c52.839,50.515) 54.114,50.515 ; C50.2@53.754,46.497 cw(c52.885,45.628) 54.114,45.628 ; C50.2@53.754,47.183 ccw(c52.885,48.052) 54.114,48.052 ; C49.2@53.781,44.683 ccw(c52.977,45.487) 54.114,45.487 ; C45.1@53.868,48.927 cw(c53.007,48.066) 54.224,48.066 ; C45.1@53.868,49.613 ccw(c53.007,50.474) 54.224,50.474 ; C50.2@53.881,47.183 ccw(c53.053,48.011) 54.224,48.011 ccw(c55.395,48.011) C50.2@54.567,47.183 ; C44.2@53.881,51.457 cw(c53.053,50.629) 54.224,50.629 cw(c55.395,50.629) C44.2@54.567,51.457 ; C49.2@54.114,44.02 C44.2@54.114,51.59 ; 54.114,45.535 ccw(c55.319,45.535) C49.2@54.467,44.683 ; 54.114,45.71 cw(c55.227,45.71) C50.2@54.44,46.497 ; 54.114,47.97 ccw(c55.227,47.97) C50.2@54.44,47.183 ; 54.114,48.173 cw(c55.181,48.173) C45.1@54.426,48.927 ; 54.114,50.367 ccw(c55.181,50.367) C45.1@54.426,49.613 ; 54.114,50.67 cw(c55.227,50.67) C44.2@54.44,51.457 ; 54.224,48.132 cw(c55.349,48.132) C45.1@54.553,48.927 ; 54.224,50.408 ccw(c55.349,50.408) C45.1@54.553,49.613 ; C52.2@58.36,62.854 65.82,62.854 C55.2@65.9,62.774 ; C52.2@58.703,62.511 cw(c59.531,61.683) 59.531,62.854 cw(c59.531,64.025) C52.2@58.703,63.197 ; 59.565,62.854 ccw(c59.565,64.185) C47.2@60.507,63.244 ; 59.792,62.854 cw(c59.792,61.844) C47.2@60.507,62.558 ; C47.2@61.192,62.558 cw(c61.907,61.844) 61.907,62.854 ; C47.2@61.192,63.244 ccw(c62.134,64.185) 62.134,62.854 ; 62.09,62.854 ccw(c62.09,64.185) C46.2@63.032,63.244 ; 62.317,62.854 cw(c62.317,61.844) C46.2@63.032,62.558 ; C46.2@63.718,62.558 cw(c64.432,61.844) 64.432,62.854 ; C46.2@63.718,63.244 ccw(c64.659,64.185) 64.659,62.854 ; C54.2@63.77,59.566 66.314,59.566 66.56,59.32 v1(67.98,59.32) ; C54.2@64.113,59.223 cw(c64.941,58.395) 64.941,59.566 cw(c64.941,60.737) C54.2@64.113,59.909 ; 64.616,62.854 ccw(c64.616,64.185) C55.2@65.557,63.244 ; 64.843,62.854 cw(c64.843,61.844) C55.2@65.557,62.558 ; 65.102,59.566 cw(c65.102,58.385) C53.2@65.937,59.22 ; 65.116,59.566 ccw(c65.116,60.727) C53.2@65.937,59.906 ; C55.2@66.13,62.73 66.16,62.7 v1(67.61,62.7) ; C55.2@66.243,62.304 cw(c67.199,61.348) 67.199,62.7 ; C55.2@66.243,62.99 ccw(c66.943,63.69) 66.943,62.7 ; C53.2@66.623,58.966 cw(c67.477,58.112) 67.477,59.32 ; C53.2@66.623,59.652 ccw(c67.424,60.453) 67.424,59.32 ; v1@67.504,62.594 ccw(c67.248,62.338) 67.248,62.7 ccw(c67.248,63.062) v1@67.504,62.806 ; v1@67.874,59.214 ccw(c67.618,58.958) 67.618,59.32 ccw(c67.618,59.682) v1@67.874,59.426 ; v1(70.59,49.36) 71.56,49.36 ; v1@70.696,49.254 cw(c70.952,48.998) 70.952,49.36 cw(c70.952,49.722) v1@70.696,49.466 ; C32.1@71.36,50.86 C32.1@71.56,50.86 ; C35.2@71.401,45.983 ccw(c70.428,46.956) 71.804,46.956 ; C31.2@71.421,52.777 cw(c70.497,51.853) 71.804,51.853 ; C32.1@71.475,50.227 cw(c70.679,49.432) 71.804,49.432 ; C32.1@71.475,50.913 ccw(c70.679,51.708) 71.804,51.708 ; C36.2@71.488,47.775 cw(c70.725,47.012) 71.804,47.012 ; C36.2@71.488,48.461 ccw(c70.725,49.224) 71.804,49.224 ; 71.78,49.14 71.56,49.36 ; 71.78,49.58 71.56,49.36 ; C35.2@71.804,45.64 C31.2@71.804,53.12 ; 71.804,46.666 ccw(c72.77,46.666) C35.2@72.087,45.983 ; 71.804,46.882 cw(c73.067,46.882) C36.2@72.174,47.775 ; 71.804,49.354 ccw(c73.067,49.354) C36.2@72.174,48.461 ; 71.804,49.367 cw(c73.021,49.367) C32.1@72.16,50.227 ; 71.804,51.773 ccw(c73.021,51.773) C32.1@72.16,50.913 ; 71.804,52.046 cw(c72.838,52.046) C31.2@72.107,52.777 ; C38.2@76.8,62.734 C41.2@84.3,62.734 ; C38.2@77.143,62.391 cw(c77.971,61.563) 77.971,62.734 cw(c77.971,63.905) C38.2@77.143,63.077 ; C34.2@78.977,62.391 ccw(c78.149,61.563) 78.149,62.734 ccw(c78.149,63.905) C34.2@78.977,63.077 ; C34.2@79.663,62.391 cw(c80.491,61.563) 80.491,62.734 cw(c80.491,63.905) C34.2@79.663,63.077 ; C40.2@81.07,59.716 83.51,59.716 C39.2@83.56,59.666 83.594,59.7 v1(85.12,59.7) ; C40.2@81.413,59.373 cw(c82.241,58.545) 82.241,59.716 cw(c82.241,60.887) C40.2@81.413,60.059 ; C33.2@81.437,62.391 ccw(c80.609,61.563) 80.609,62.734 ccw(c80.609,63.905) C33.2@81.437,63.077 ; C33.2@82.123,62.391 cw(c82.951,61.563) 82.951,62.734 cw(c82.951,63.905) C33.2@82.123,63.077 ; 82.268,59.716 cw(c82.268,58.374) C39.2@83.217,59.323 ; 82.51,59.716 ccw(c82.51,60.716) C39.2@83.217,60.009 ; C39.2@83.903,59.323 cw(c84.813,58.413) 84.813,59.7 ; C39.2@83.903,60.009 ccw(c84.649,60.755) 84.649,59.7 ; C41.2@83.957,62.391 ccw(c83.129,61.563) 83.129,62.734 ccw(c83.129,63.905) C41.2@83.957,63.077 ; C41.2@84.11,62.734 84.214,62.63 v1(86.07,62.63) ; C41.2@84.643,62.264 cw(c85.526,61.381) 85.526,62.63 ; C41.2@84.643,62.95 ccw(c85.415,63.722) 85.415,62.63 ; v1@85.014,59.594 ccw(c84.758,59.338) 84.758,59.7 ccw(c84.758,60.062) v1@85.014,59.806 ; v1@85.964,62.524 ccw(c85.708,62.268) 85.708,62.63 ccw(c85.708,62.992) v1@85.964,62.736 ; C21.1@198.99,60.8 201.02,60.8 ; C21.1@200.452,60.473 cw(c201.02,60.143) 201.02,60.8 ; C21.1@200.452,61.127 ccw(c201.02,61.457) 201.02,60.8 ; v1@201.264,57.566 ccw(c201.008,57.822) 201.37,57.822 ccw(c201.732,57.822) v1@201.476,57.566 ; v1(201.37,57.46) 201.37,60.45 201.02,60.8 ; v1(203.47,52.74) 205.22,52.74 C19.2@205.25,52.71 ; v1@203.576,52.634 cw(c203.832,52.378) 203.832,52.74 cw(c203.832,53.102) v1@203.576,52.846 ; v1@203.654,52.74 ccw(c203.654,54.013) C19.2@204.554,53.113 ; 203.799,52.74 cw(c203.799,51.672) 204.554,52.427 cw(c204.067,51.94) 204.756,51.94 ; C20.2@204.413,50.573 ccw(c203.585,51.401) 204.756,51.401 ccw(c205.927,51.401) C20.2@205.099,50.573 ; 204.756,51.259 cw(c206.408,51.259) C19.2@205.24,52.427 ; 204.756,51.983 cw(c205.684,51.983) C19.2@205.028,52.639 ; C20.2@205.014,50.361 ccw(c205.885,51.232) 205.885,50 ; C19.2@205.024,52.77 204.756,52.502 C20.2@204.756,50.23 204.986,50 C18.1@207.51,50 ; C20.2@205.226,49.887 cw(c205.499,49.614) C20.2@205.499,50 ; C20.2@205.226,50.573 ccw(c206.609,51.956) 206.609,50 ; 205.583,50 ccw(c205.583,51.99) C18.1@206.99,50.583 ; 206.307,50 ccw(c206.307,51.266) C18.1@207.202,50.371 ; C18.1@206.742,50 cw(c206.742,49.649) C18.1@206.99,49.897 ; C17.2@208.461,58.163 ccw(c207.691,58.933) v1@208.78,58.933 ; C17.2@208.67,57.62 208.78,57.73 v1(208.78,59.11) ; v1@208.674,59.004 cw(c208.418,58.748) 208.78,58.748 cw(c209.142,58.748) v1@208.886,59.004 ; v1@208.78,59.049 ccw(c210.033,59.049) C17.2@209.147,58.163
  Bottom Layer w0.5: C68.2@8.104,32.09 6.305,32.09 v1(4.495,33.9) 5.155,34.56 C66.1@8.15,34.56 ; v1(16.042,32.058) 16.042,35.365 16.767,36.09 20.754,36.09 C73.2@20.78,36.064 ; C64.1@25.288,26.184 25.311,26.207 v1(25.311,28.141) ; v1(27.049,36.629) 27.049,38.861 27.624,39.436 C60.2@29.28,39.436 ; v1(31.631,34.142) 32.84,34.142 C74.1@33.15,34.452 ; v1(41.917,44.794) 42.01,44.701 C61.1@42.01,39.05 ; v1(46.663,42.591) 46.663,41.483 C57.1@46.72,41.426
  Bottom Layer w0.8: C76.2@29.18,41.664 29.28,41.564 C60.2@29.28,39.436 ; P4.22@104.151,81.446 ccw(c102.614,82.983) 104.787,82.983 ccw(c106.96,82.983) P4.22@105.423,81.446 ; P4.21@104.151,91.174 cw(c102.614,89.637) 104.787,89.637 cw(c106.96,89.637) P4.21@105.423,91.174 ; P4.22@104.787,80.81 P4.21@104.787,91.81
  other v1: 13.27,28.08 14.19,28.08 68.42,41.52 34.425,42.14 35.425,42.14
GNDA_ADC: P1.34
GPIO_20: P1.41
GPIO_22: P2.19
GPIO_23: P2.13
GPIO_26: P2.14
GPIO_27: P2.17
GPIO_40: P1.14
GPIO_44: P2.12
GPIO_45: P2.11
GPIO_46: P2.16
GPIO_47: P2.15
GPIO_49: P1.23
GPIO_51: P1.16
GPIO_60: P1.12
GPIO_61: P2.26
GPIO_62: P2.21
GPIO_63: P2.20
GPIO_65: P2.18
GPIO_66: P2.7
GPIO_67: P2.8
GPIO_68: P2.10
GPIO_69: P2.9
GPIO_117: P1.25
GPIO_125: P1.27
I2C2_SCL: P1.19 U7.22 U9.2 | length 129.7
  Top Layer w0.3: v1@125.03,42.62 cw(c125.03,42.258) 125.286,42.514 cw(c125.542,42.77) v1@125.18,42.77 ; v1(125.03,42.77) 125.65,42.15 125.65,41.41 129.58,37.48 129.58,24.45 v1(128.95,23.82) ; v1@128.95,23.97 ccw(c128.95,24.332) 129.206,24.076 ccw(c129.462,23.82) v1@129.1,23.82
  Bottom Layer w0.3: U9.2@46.916,20.994 ccw(c45.891,22.019) 47.34,22.019 ccw(c48.789,22.019) U9.2@47.764,20.994 ; U9.2@47.34,20.57 47.34,22.77 48.49,23.92 66.81,23.92 67.37,24.48 67.37,27.02 P1.19@68.64,28.29 69.93,27 69.93,24.75 70.89,23.79 128.92,23.79 v1(128.95,23.82) ; P1.19@68.04,28.29 cw(c66.591,28.29) 67.616,27.266 cw(c68.64,26.241) 68.64,27.69 cw(c68.64,26.241) 69.664,27.266 cw(c70.689,28.29) P1.19@69.24,28.29 ; v1(125.03,42.77) 125.575,43.315 131.525,43.315 132.225,44.015 U7.22@133.491,44.015 ; v1@125.03,42.92 ccw(c125.03,43.282) 125.286,43.026 ccw(c125.542,42.77) v1@125.18,42.77 ; 128.515,23.79 ccw(c128.515,24.255) v1@128.844,23.926
I2C2_SDA: P1.20 U7.23 U9.3 | length 123.4
  Top Layer w0.3: v1(124.49,43.87) 125.12,43.87 126.25,42.74 126.25,41.67 130.18,37.74 130.18,23.61 v1(129.57,23) ; v1@124.596,43.764 cw(c124.852,43.508) 124.852,43.87 cw(c124.852,44.232) v1@124.596,43.976 ; v1@129.57,23.15 ccw(c129.57,23.512) 129.826,23.256 ccw(c130.082,23) v1@129.72,23
  Bottom Layer w0.3: U9.3@49.456,20.994 ccw(c48.431,22.019) 49.88,22.019 ccw(c51.329,22.019) U9.3@50.304,20.994 ; U9.3@49.88,20.57 49.88,22.42 50.78,23.32 67.39,23.32 68.65,24.58 ; P1.20@68.296,25.258 cw(c67.823,24.58) 68.65,24.58 ; P1.20@68.64,25.75 68.65,25.74 68.65,24.58 ; P1.20@68.997,25.268 ccw(c69.505,24.58) 68.65,24.58 ; v1@124.49,43.915 131.235,43.915 131.985,44.665 U7.23@133.491,44.665 ; v1@124.596,43.764 cw(c124.961,43.399) 124.961,43.915 ; v1@129.464,22.894 ccw(c129.208,22.638) 129.208,23 ccw(c129.208,23.362) v1@129.464,23.106 ; v1(129.57,23) 128.71,23 128.52,23.19 70.04,23.19 68.65,24.58
IN_LED0: D3.1 U3.4 | length 42.1
  Top Layer w0.3: U3.4@97.758,45.655 98.785,45.655 v1(98.8,45.64) ; 98.402,45.655 cw(c98.402,45.242) v1@98.694,45.534 ; 98.474,45.655 ccw(c98.474,45.966) v1@98.694,45.746 ; D3.1@112.266,25.344 cw(c111.498,24.54) v1(112.61,24.54) 112.61,25.751 D3.1@112.601,25.76 ; v1@112.504,24.646 ccw(c112.248,24.902) 112.61,24.902 ccw(c112.972,24.902) v1@112.716,24.646 ; v1@112.61,24.546 cw(c113.75,24.546) D3.1@112.944,25.352
  Bottom Layer w0.3: v1@98.694,45.534 ccw(c98.438,45.278) 98.438,45.64 ccw(c98.438,46.002) v1@98.694,45.746 ; v1(98.8,45.64) 96.45,45.64 95.53,44.72 95.53,33.35 99.03,29.85 103.41,29.85 108.72,24.54 v1(112.61,24.54) ; v1@112.504,24.434 ccw(c112.248,24.178) 112.248,24.54 ccw(c112.248,24.902) v1@112.504,24.646
IN_LED1: D4.1 U3.6 | length 45.7
  Top Layer w0.3: U3.6@97.758,44.355 98.789,44.355 v1(98.8,44.344) ; 98.411,44.355 cw(c98.411,43.954) v1@98.694,44.238 ; 98.465,44.355 ccw(c98.465,44.679) v1@98.694,44.45 ; D4.1@112.66,31.11 cw(c112.66,29.782) 113.599,30.721 ; D4.1@112.66,31.66 114.46,29.86 v1(114.46,26.09) ; D4.1@113.145,31.595 ccw(c114.159,31.595) 113.442,30.878 ; v1@114.354,26.196 ccw(c114.098,26.452) 114.46,26.452 ccw(c114.822,26.452) v1@114.566,26.196
  Bottom Layer w0.3: v1@98.694,44.238 ccw(c98.438,43.982) 98.438,44.344 ccw(c98.438,44.706) v1@98.694,44.45 ; v1(98.8,44.344) 97.274,44.344 96.13,43.2 96.13,33.6 99.28,30.45 103.78,30.45 108.14,26.09 v1(114.46,26.09) ; v1@114.354,25.984 ccw(c114.098,25.728) 114.098,26.09 ccw(c114.098,26.452) v1@114.354,26.196
IN_LED2: D5.1 U3.8 | length 41.6
  Top Layer w0.3: U3.8@97.758,43.055 98.792,43.055 v1(98.8,43.047) ; 98.42,43.055 cw(c98.42,42.667) v1@98.694,42.941 ; 98.456,43.055 ccw(c98.456,43.391) v1@98.694,43.154 ; D5.1@116.08,25.343 cw(c115.317,24.54) v1(116.425,24.54) 116.425,25.749 D5.1@116.414,25.76 ; v1@116.319,24.646 ccw(c116.063,24.902) 116.425,24.902 ccw(c116.787,24.902) v1@116.531,24.646 ; v1@116.425,24.55 cw(c117.558,24.55) D5.1@116.757,25.352
  Bottom Layer w0.3: v1@98.694,42.941 ccw(c98.438,42.685) 98.438,43.047 ccw(c98.438,43.41) v1@98.694,43.154 ; v1(98.8,43.047) 97.507,43.047 96.73,42.27 96.73,33.849 99.459,31.12 104.056,31.12 108.186,26.99 115.43,26.99 116.425,25.995 v1(116.425,24.54) ; v1@116.319,24.646 ccw(c116.063,24.902) 116.425,24.902 ccw(c116.787,24.902) v1@116.531,24.646
IN_LED3: D6.1 U3.10 | length 44.2
  Top Layer w0.3: U3.10@97.758,41.755 98.796,41.755 v1(98.8,41.751) ; 98.429,41.755 cw(c98.429,41.38) v1@98.694,41.645 ; 98.447,41.755 ccw(c98.447,42.104) v1@98.694,41.857 ; D6.1@116.156,31.224 cw(c115.588,30.551) 116.469,30.551 ; D6.1@116.469,31.66 116.469,30.551 ; D6.1@116.782,31.224 ccw(c117.351,30.551) 116.469,30.551 ; v1@118.11,26.13 ccw(c117.748,26.13) 118.004,26.386 ccw(c118.26,26.642) v1@118.26,26.28 ; v1(118.26,26.13) 117.69,26.7 117.69,29.33 116.469,30.551
  Bottom Layer w0.3: v1@98.694,41.645 ccw(c98.438,41.389) 98.438,41.751 ccw(c98.438,42.113) v1@98.694,41.857 ; v1(98.8,41.751) 97.801,41.751 97.33,41.28 97.33,34.097 99.707,31.72 104.31,31.72 108.44,27.59 116.8,27.59 v1(118.26,26.13) ; v1@118.11,26.13 ccw(c117.748,26.13) 118.004,26.386 ccw(c118.26,26.642) v1@118.26,26.28
IN_LED4: D7.1 U3.12 | length 40.2
  Top Layer w0.3: U3.12@97.758,40.455 v1(98.8,40.455) ; v1@98.694,40.349 ccw(c98.438,40.093) 98.438,40.455 ccw(c98.438,40.817) v1@98.694,40.561 ; D7.1@119.894,25.342 cw(c119.135,24.54) v1(120.239,24.54) 120.239,25.747 D7.1@120.227,25.76 ; v1@120.133,24.646 ccw(c119.877,24.902) 120.239,24.902 ccw(c120.601,24.902) v1@120.345,24.646 ; v1@120.239,24.555 cw(c121.367,24.555) D7.1@120.57,25.352
  Bottom Layer w0.3: 98.126,40.026 cw(c98.8,39.351) v1@98.8,40.305 ; v1(98.8,40.455) 98.555,40.455 97.93,39.83 97.93,34.346 99.956,32.32 104.659,32.32 108.779,28.2 117.79,28.2 120.239,25.751 v1(120.239,24.54) ; v1@120.133,24.646 ccw(c119.877,24.902) 120.239,24.902 ccw(c120.601,24.902) v1@120.345,24.646
IN_LED5: D8.1 U3.17 | length 34.2
  Top Layer w0.3: v1(102.66,40.47) 102.675,40.455 U3.17@103.702,40.455 ; v1@102.766,40.364 cw(c102.986,40.144) 102.986,40.455 ; v1@102.766,40.576 ccw(c103.058,40.868) 103.058,40.455 ; v1@118.604,28.526 ccw(c118.348,28.782) 118.71,28.782 ccw(c119.072,28.782) v1@118.816,28.526 ; v1(118.71,28.42) 118.71,30.092 D8.1@120.278,31.66 ; 119.339,30.721 cw(c120.278,29.782) D8.1@120.278,31.11 ; 119.496,30.878 ccw(c118.779,31.595) D8.1@119.793,31.595
  Bottom Layer w0.3: v1(102.66,40.47) 104.38,40.47 105.32,39.53 105.32,32.52 108.98,28.86 118.27,28.86 v1(118.71,28.42) ; v1@102.766,40.364 cw(c103.022,40.108) 103.022,40.47 cw(c103.022,40.832) v1@102.766,40.576 ; v1@118.56,28.42 ccw(c118.198,28.42) 118.454,28.676 ccw(c118.71,28.932) v1@118.71,28.57
IN_LED6: D9.1 U3.19 | length 39.6
  Top Layer w0.3: v1(102.66,41.765) 102.67,41.755 U3.19@103.702,41.755 ; v1@102.766,41.659 cw(c102.998,41.427) 102.998,41.755 ; v1@102.766,41.871 ccw(c103.046,42.151) 103.046,41.755 ; D9.1@123.707,25.342 cw(c122.954,24.54) v1(124.054,24.54) 124.054,25.745 D9.1@124.039,25.76 ; v1@123.948,24.646 ccw(c123.692,24.902) 124.054,24.902 ccw(c124.416,24.902) v1@124.16,24.646 ; v1@124.054,24.559 cw(c125.175,24.559) D9.1@124.382,25.352
  Bottom Layer w0.3: v1(102.66,41.765) 103.961,41.765 105.93,39.796 105.93,32.76 109.21,29.48 120.22,29.48 124.054,25.646 v1(124.054,24.54) ; v1@102.766,41.659 cw(c103.022,41.403) 103.022,41.765 cw(c103.022,42.127) v1@102.766,41.871 ; v1@123.948,24.646 ccw(c123.692,24.902) 124.054,24.902 ccw(c124.416,24.902) v1@124.16,24.646